# Altium PCB Bluetooth Transmitter.PcbDoc
Units mil, origin at the board's own origin, x right, y up, seen from the top; angles counter-clockwise.
Board outline 6000 x 4000 mil, 2 copper layers (Top Layer, Bottom Layer); 22 components, 26 nets, 127 pads, 22 vias.
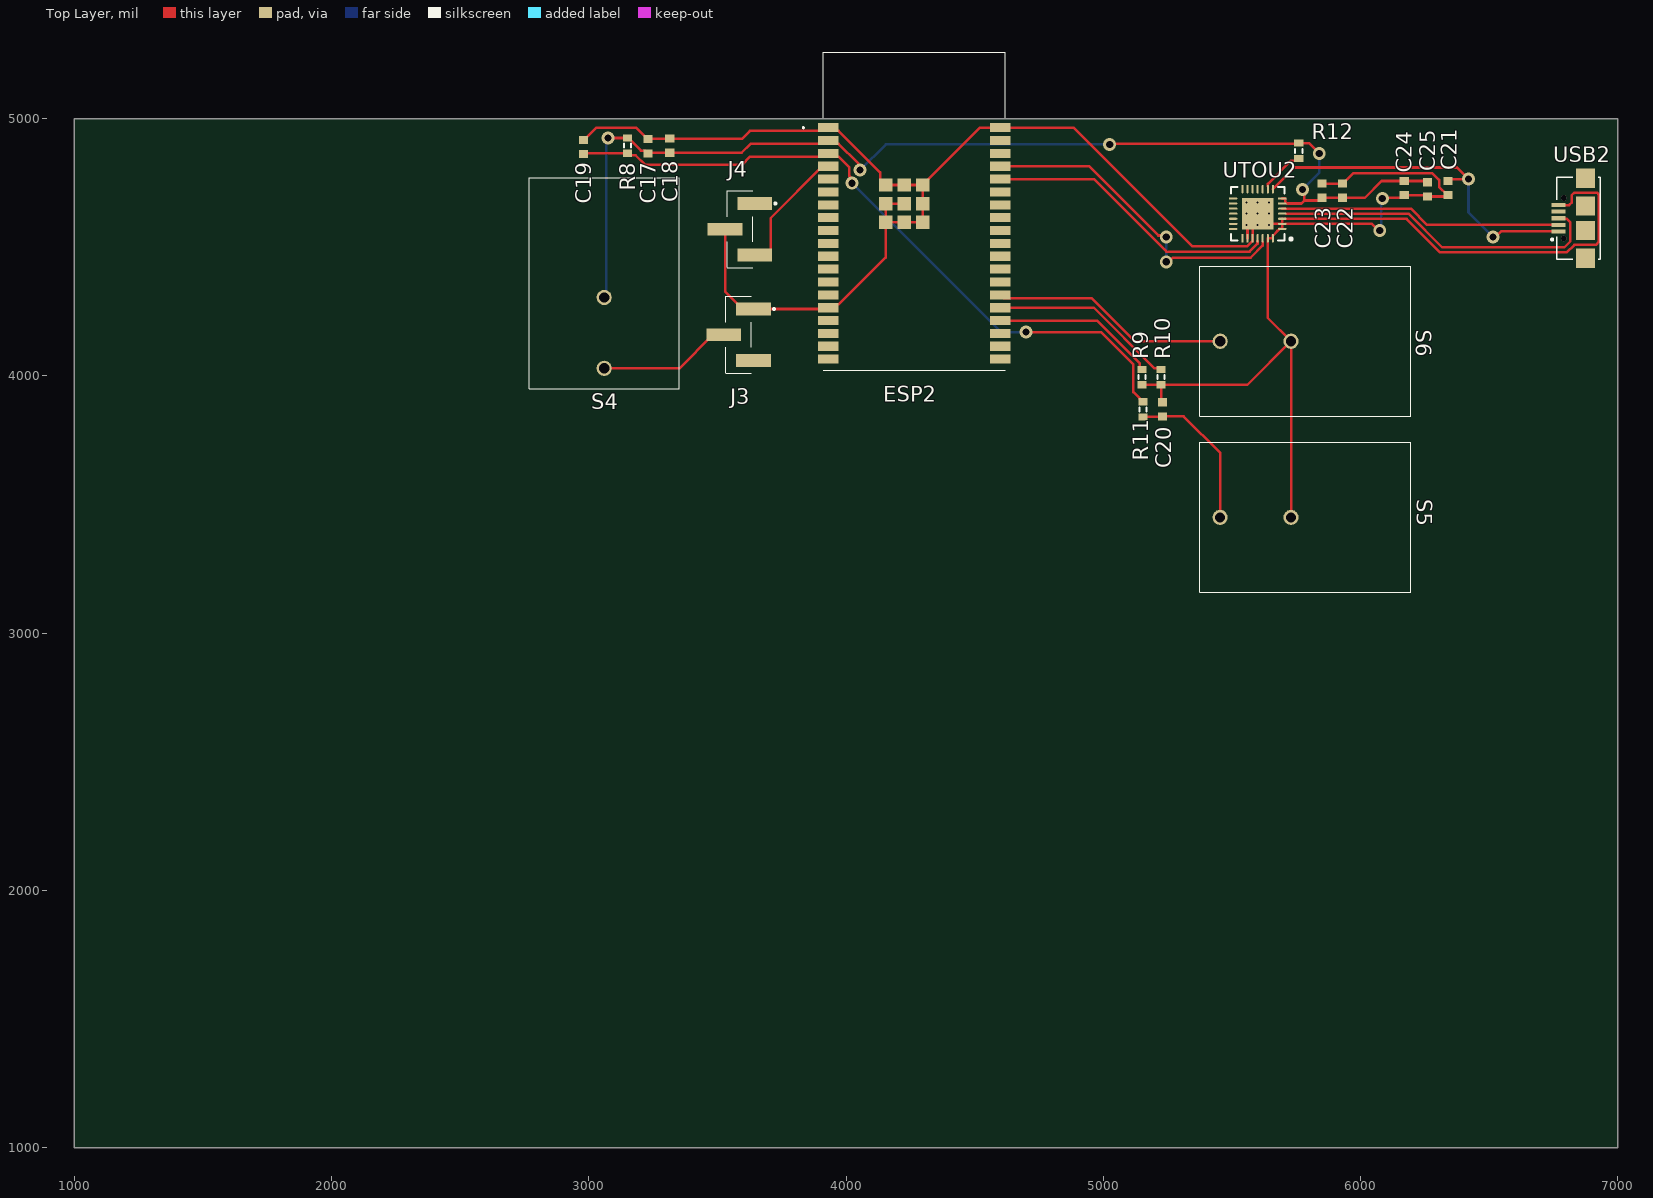
[diagram p0: Top Layer view]
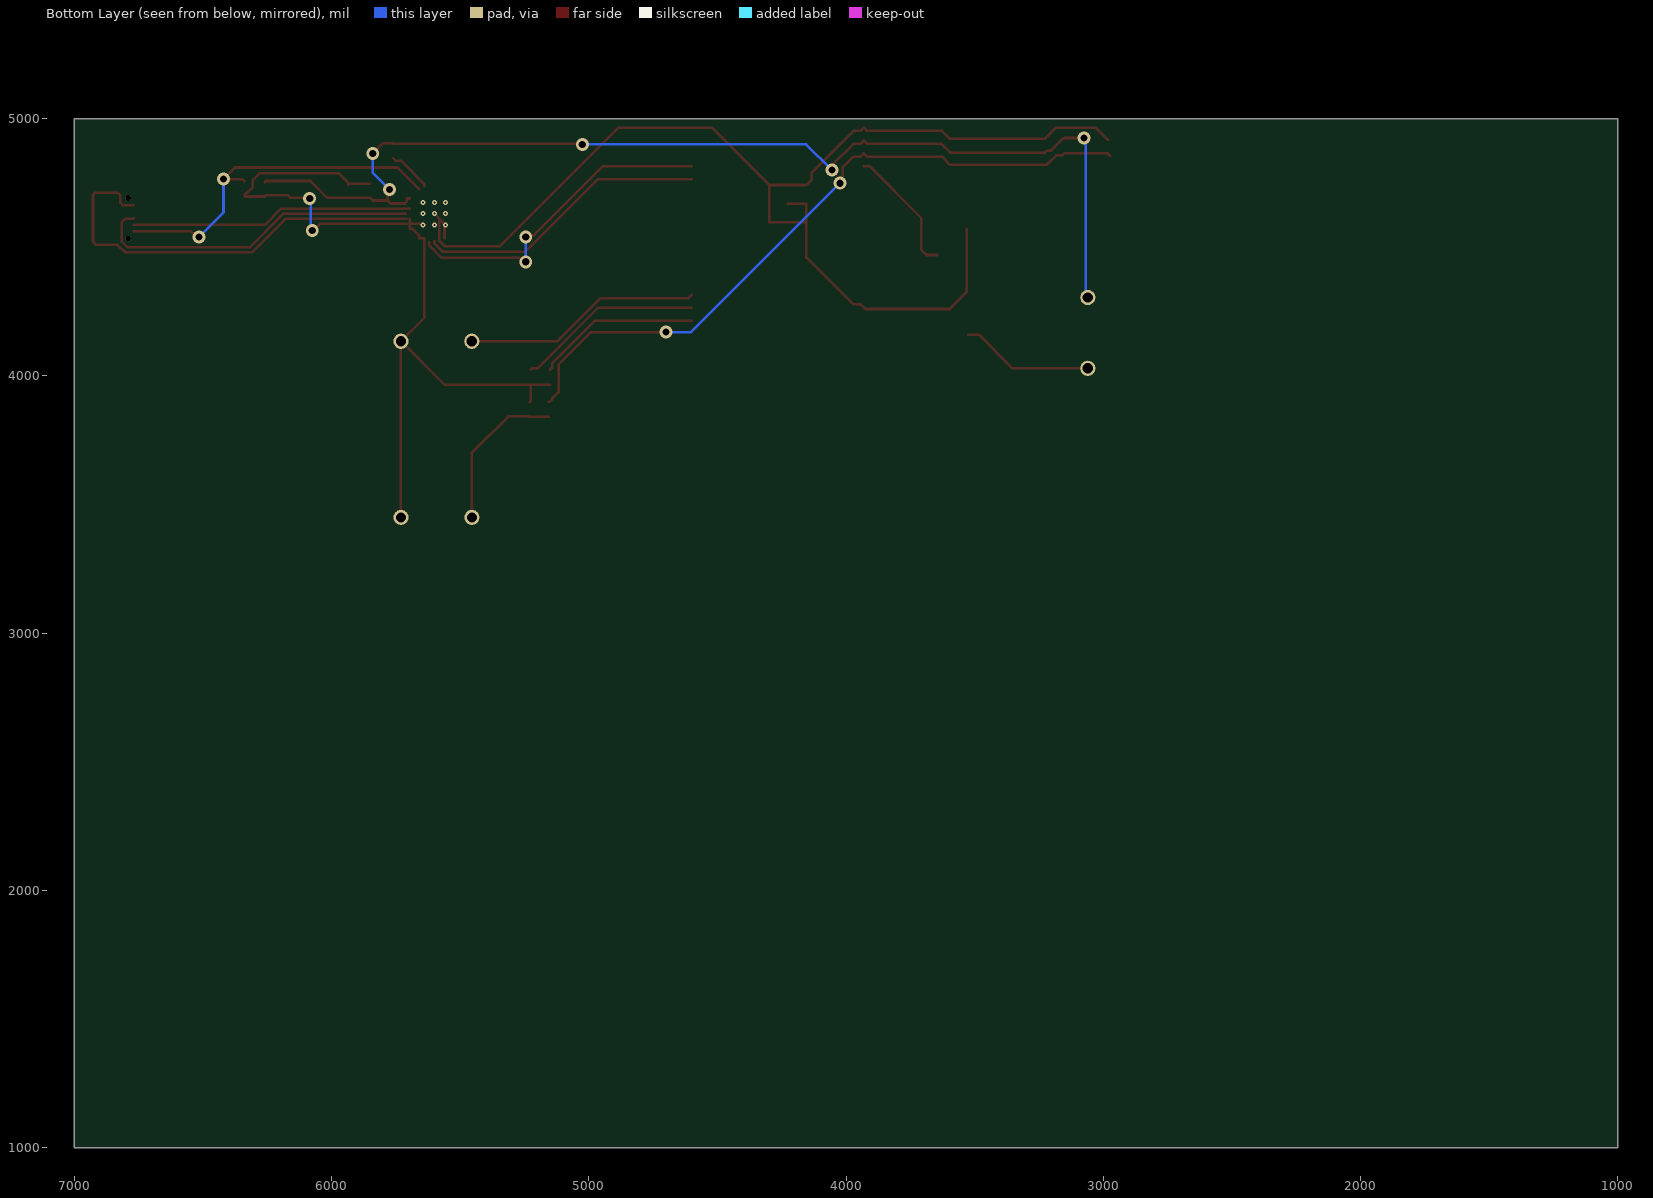
[diagram p1: Bottom Layer view, seen from below]

## Layer stack, top to bottom
Top Solder: solder mask 0.4, Solder Resist, Dk 3.5
Top Layer: signal copper 1.4
Dielectric 1: dielectric 12.6, FR-4, Dk 4.8
Bottom Layer: signal copper 1.4
Bottom Solder: solder mask 0.4, Solder Resist, Dk 3.5

## Board outline
1000,1000 7000,1000 7000,5000 1000,5000

## Design rules (kind name [scope] priority, off if disabled: settings)
Clearance [All] p1: gap=5 ignorepadtopadclearanceinfootprint=FALSE except(0: Arc-Hole Track-Hole SMDPad-Hole THPad-Hole Via-Hole Fill-Hole Poly-Hole Region-Hole Text-Hole)
PolygonConnect [All] p1: connectstyle=Relief reliefconductorwidth=10 reliefentries=4 polygonreliefangle="90 Angle" airgapwidth=10
RoutingVias [All] p1: holewidth=28 width=50 viastyle="Through Hole" minholewidth=28 minwidth=50 maxholewidth=28 maxwidth=50
SolderMaskExpansion [All] p1: expansion=4 istentingtop=FALSE
Width [All] p1: maxlimit=10 minlimit=10 preferedwidth=10
30 further rules are at their usual default settings.

## Components (designator, comment, footprint, x,y, rotation, side; value= is the part's Value field where it differs from the comment)
C17 "Cap" 1608[0603] 3230,4892.56 r270 top value=22uF
C18 "Cap" 1608[0603] 3315,4895 r270 top value=0.1uF
C19 "Cap" 1608[0603] 2980,4890 r270 top value=1uF
C20 "Cap" 1608[0603] 5230,3870 r90 top value=0.1uF
C21 "Cap" 1608[0603] 6340,4730 r90 top value=1uF
C22 "Cap" 1608[0603] 5930,4720 r90 top value=0.1uF
C23 "Cap" 1608[0603] 5850,4720 r90 top value=1uF
C24 "Cap" 1608[0603] 6170,4730 r90 top value=4.7uF
C25 "Cap" 1608[0603] 6260,4725 r90 top value=0.1uF
ESP2 "ESP32-WROVER-E__16MB_" ESP32WROVERE16MB 3930.71,4669.72 r0 top
J3 "TSM-103-01-L-SV-P-TR" TSM10301LSVPTR 3582.48,4160 r90 top
J4 "TSM-103-01-L-SV-P-TR" TSM10301LSVPTR 3587.52,4570 r90 top
R8 "Res3" J1-0603 3150,4895 r270 top value=10K
R9 "Res3" J1-0603 5150,3995 r270 top value=10K
R10 "Res3" J1-0603 5225,3995 r270 top value=10K
R11 "Res3" J1-0603 5155,3870 r90 top value=4.7K
R12 "Res3" J1-0603 5760,4875 r270 top value=10K
S4 "ON/OFF" R1966ABLKBLKEF 3060,4305 r270 top
S5 "EN" R1966ABLKBLKEF 5730,3450 r180 top
S6 "BOOT" R1966ABLKBLKEF 5730.3,4134.7 r180 top
USB2 "UJ2-MIBH-G-SMT-TR" CUI_UJ2-MIBH-G-SMT-TR 6875,4612.76 r90 top
UTOU2 "CP2101-GM" SLAB-QFN-28-3125x3125TP_A_N 5600.31,4630.47 r180 top

## Footprints (in the part's own frame and the unit in brackets; to place one, negate y for a bottom-side part, rotate by r counter-clockwise, add the part's x,y. Pads: shape width x height; smd on the part's side, far side on the other; paste and mask are expansions set on the pad)
1608[0603] [mm] "Chip Capacitor, Body 1.6x0.8mm, IPC High Density"
  rect 0.8x0.9 smd: 1(-0.7,0) 2(0.7,0)
  body extent -0.87,-0.48 0.87,0.48, height 1.3
CUI_UJ2-MIBH-G-SMT-TR [mm]
  rect 0.4x1.35 smd: 1(-1.3,2.675) 2(-0.65,2.675) 3(0,2.675) 4(0.65,2.675) 5(1.3,2.675)
  rect 1.9x1.9 smd: S1(-3.95,0) S2(-1.2,0) S3(1.2,0) S4(3.95,0)
  round 0.55 hole 0.55 unplated: ""(-2,2.15) ""(2,2.15)
  silkscreen extent -4.05,-1.45 4.05,3.4
ESP32WROVERE16MB [mm]
  rect 2x0.9 smd: 1(0,7.5) 2(0,6.23) 3(0,4.96) 4(0,3.69) 5(0,2.42) 6(0,1.15) 7(0,-0.12) 8(0,-1.39) 9(0,-2.66) 10(0,-3.93) 11(0,-5.2) 12(0,-6.47) 13(0,-7.74) 14(0,-9.01) 15(0,-10.28) 16(0,-11.55) 17(0,-12.82) 18(0,-14.09) 19(0,-15.36) 20(17,-15.36) 21(17,-14.09) 22(17,-12.82) 23(17,-11.55) 24(17,-10.28) 25(17,-9.01) 26(17,-7.74) 27(17,-6.47) 28(17,-5.2) 29(17,-3.93) 30(17,-2.66) 31(17,-1.39) 32(17,-0.12) 33(17,1.15) 34(17,2.42) 35(17,3.69) 36(17,4.96) 37(17,6.23) 38(17,7.5)
  rect 1.33x1.33 smd: 39(5.665,1.835) 40(7.5,1.835) 41(9.335,1.835) 42(5.665,0) 43(7.5,0) 44(9.335,0) 45(5.665,-1.835) 46(7.5,-1.835) 47(9.335,-1.835)
  silkscreen extent -2.5,-16.46 17.5,14.94, body extent -0.51,-16.46 17.49,14.94, height 3.31
J1-0603 [mm] "Chip Resistor, Body 1.6x0.8mm, IPC High Density"
  rect 0.7x0.9 smd: 1(-0.75,0) 2(0.75,0)
  silkscreen extent -0.2,-0.35 0.2,0.35, body extent -0.85,-0.48 0.85,0.48, height 0.9
R1966ABLKBLKEF [mm]
  round 1.5 hole 1: 1(0,0) 2(7,0)
  silkscreen extent -11.8,-7.4 9,7.4
SLAB-QFN-28-3125x3125TP_A_N [mm] "QFN, 28-Leads, Body 5x5mm, Pitch 0.5mm, Thermal Pad 3.13x3.13mm, IPC Medium Density"
  oval 0.85x0.2 smd: 1(-2.425,1.5) 2(-2.425,1) 3(-2.425,0.5) 4(-2.425,0) 5(-2.425,-0.5) 6(-2.425,-1) 7(-2.425,-1.5) 15(2.425,-1.5) 16(2.425,-1) 17(2.425,-0.5) 18(2.425,0) 19(2.425,0.5) 20(2.425,1) 21(2.425,1.5)
  oval 0.2x0.85 smd: 8(-1.5,-2.425) 9(-1,-2.425) 10(-0.5,-2.425) 11(0,-2.425) 12(0.5,-2.425) 13(1,-2.425) 14(1.5,-2.425) 22(1.5,2.425) 23(1,2.425) 24(0.5,2.425) 25(0,2.425) 26(-0.5,2.425) 27(-1,2.425) 28(-1.5,2.425)
  rect 3.13x3.13 smd: 29(0,0)
  silkscreen extent -3.42,-2.65 2.65,2.65, body extent -2.5,-2.5 2.5,2.5, height 1
TSM10301LSVPTR [mm]
  rect 1.27x3.43 smd: 1(2.54,-1.46) 2(0,1.46) 3(-2.54,-1.46)
  silkscreen extent -3.81,-3.6 3.81,1.27

## Part data
C17 C18 C19 C20 C21 C22 C23 C24 C25: library part "Cap Semi", "Capacitor (Semiconductor SIM Model)", LatestRevisionDate=29-May-2009, LatestRevisionNote="IPC-7351 Footprint Added.", PackageDescription="Chip Capacitor", PackageReference=C1206, Published=8-Jun-2000, Publisher="Altium Limited"
ESP2: "Integrated Circuit", Manufacturer_Name="Espressif Systems", Manufacturer_Part_Number="ESP32-WROVER-E (16MB)", Mouser Part Number=356-ESP32WRVE22864PC, Datasheet Link=https://www.espressif.com/sites/default/files/documentation/esp32-wrover_datasheet_en.pdf, Height=3.4mm, Mouser Price/Stock=https://www.mouser.co.uk/ProductDetail/Espressif-Systems/ESP32-WROVER-E-16MB?qs=GBLSl2Akirv1e4kp%252BlJr4g%3D%3D
J3 J4: "Connector", Manufacturer_Name=SAMTEC, Mouser Part Number=200-TSM10301LSVPTR, Arrow Part Number=TSM-103-01-L-SV-P-TR, Arrow Price/Stock=https://www.arrow.com/en/products/tsm-103-01-l-sv-p-tr/samtec?region=europe, Datasheet Link=https://datasheet.datasheetarchive.com/originals/dk/DKDS40/DSANUWW0019078.pdf, Manufacturer_Part_Number=TSM-103-01-L-SV-P-TR, Mouser Price/Stock=https://www.mouser.co.uk/ProductDetail/Samtec/TSM-103-01-L-SV-P-TR?qs=DZ6FV2pdG5tjRaLOEfFPgw%3D%3D
R8 R9 R10 R11 R12: "Resistor", LatestRevisionDate=29-May-2009, LatestRevisionNote="IPC-7351 Footprint Added.", PackageDescription="Chip Resistor", PackageReference=J1-0603, Published=8-Jun-2000, Publisher="Altium Limited"
S4 S5 S6: library part SW-PB, "Switch", LatestRevisionDate=17-Jul-2002, LatestRevisionNote="Re-released for DXP Platform.", PackageDescription="Switch; 2 Leads", PackageReference=SPST-2, Published=24-Mar-1999, Publisher="Altium Limited"
USB2: "USB micro B type receptacle", Package=None, Availability=Unavailable, MP=UJ2-MIBH-G-SMT-TR, Price=None
UTOU2: "Single-Chip USB to UART Bridge, 512 Bytes EEPROM, -40 to 85 degC, 28-pin QFN, Tube", Manufacturer="Silicon Labs", ComponentLink1Description="Manufacturer URL", ComponentLink1URL=http://www.silabs.com/, ComponentLink2Description=Datasheet, ComponentLink2URL=http://www.silabs.com/Support%20Documents/TechnicalDocs/CP2101.pdf, ComponentLink3Description="Package Specification", ComponentLink3URL=http://www.silabs.com/Support%20Documents/TechnicalDocs/C8051F35x.pdf, DatasheetVersion="Rev. 1.8", EEPROM="512 Bytes", Internal Oscillator=TRUE, Mounting Technology="Surface Mount", PackageDescription="28-Pin Quad-Flat No-Leads Package, Body 5 x 5 mm, Pitch 0.5 mm", PackageReference=QFN-28, PartNumber=CP2101-GM, Sub-Family="USB Bridges"

## Via types
v1: diameter 50, hole 28, Top Layer to Bottom Layer, 13 vias
v2: diameter 19.68, hole 7.87, Top Layer to Bottom Layer, 9 vias

## Nets (pads, with @x,y where several pads share a name; then routed paths per layer and width w, separated by ;. In a path a pad name is that pad's centre, name@x,y a point inside that pad or via, vN(x,y) a via of type N, cw(c..) or ccw(c..) an arc to the next point about the centre after c; other vN are vias at no path point)
3V3: C17.2 C18.2 C22.1 C23.1 C24.2 C25.2 ESP2.2 R8.1 R12.1 S4.1 UTOU2.6 UTOU2.7 | length 4385.4
  Top Layer w10: v1(3075,4925) 3075.24,4924.76 3149.29,4924.76 3149.53,4925 R8.1 3153.94,4924.53 3202.72,4875.75 3219.25,4875.75 C17.2 3232.44,4867.44 C18.2 3594.61,4867.44 3629.45,4902.28 3917.99,4902.28 ESP2.2 3943.43,4902.28 3971.73,4902.28 4047.35,4826.66 4047.35,4807.65 v1(4055,4800) ; v1(5025,4900) 5027.26,4902.26 5757.74,4902.26 R12.1 5800.47,4904.53 v1(5840,4865) ; UTOU2.7 5706.46,4689.53 5707.52,4688.46 5707.52,4677.8 5715.31,4670 5770.3,4670 5781.99,4681.69 ; v1(5775,4725) 5781.99,4718.01 5781.99,4681.69 ; C25.2 6255,4757.56 C24.2 6082.56,4757.56 6017.44,4692.44 C22.1 C23.1 5839.25,4681.69 5781.99,4681.69
  Bottom Layer w10: S4.1 3067.5,4312.5 3067.5,4917.5 v1(3075,4925) ; v1(4055,4800) 4155,4900 v1(5025,4900) ; v1(5775,4725) 5840,4790 v1(5840,4865)
"ANALOG IN": ESP2.4 J4.3 | length 500.9
  Top Layer w10: J4.3 3687.52,4470 3707.52,4490 3707.52,4613.46 3909.06,4815 ESP2.4
"Channel 1": 
"Channel 2": 
D+: USB2.3 UTOU2.4 | length 1295
  Top Layer w10: UTOU2.4@5710.95,4630 6187.82,4630 6317.82,4500 6792.86,4500 6816.18,4523.32 6816.18,4596.33 6802.47,4610.04 6772.4,4610.04 USB2.3
D-: USB2.2 UTOU2.5 | length 1100
  Top Layer w10: UTOU2.5 5695.94,4650 6196.1,4650 6258.94,4587.17 USB2.2
EN: C19.2 ESP2.3 R8.2 R11.2 | length 2728.5
  Top Layer w10: C19.2@2973.03,4855.47 C19.2 2983.03,4865.47 R8.2 3157.87,4857.61 3182.72,4857.61 3220.32,4820 3595,4820 3627.28,4852.28 3917.99,4852.28 ESP2.3 3943.43,4852.28 3971.73,4852.28 4013.36,4810.65 4013.36,4776.64 4015.55,4774.45 4015.55,4756.77 v1(4023.2,4749.12) v1@4030,4742.32 ; v1(4700,4170) 4991.72,4170 5117.28,4044.43 5117.28,3937.24 5142.28,3912.24 5142.28,3908.31 5151.06,3899.53 R11.2
  Bottom Layer w10: v1(4023.2,4749.12) 4602.32,4170 v1(4700,4170)
GND: C17.1 C18.1 C19.1 C20.2 C21.1 C22.2 C23.2 C24.1 C25.1 ESP2.1 ESP2.15 ESP2.38 ESP2.39 ESP2.40 ESP2.41 ESP2.42 ESP2.43 ESP2.44 ESP2.45 ESP2.46 ESP2.47 J3.1 J4.2 R9.2 R10.2 S5.1 S6.1 USB2.5 UTOU2.1 UTOU2.2 UTOU2.3 UTOU2.23 UTOU2.24 UTOU2.27 UTOU2.28 UTOU2.29 | length 9830.8
  Top Layer w10: C19.1 2981.97,4917.56 3029.41,4965 3183.15,4965 3225.59,4922.56 C18.1 3597.17,4922.56 3626.89,4952.28 3917.99,4952.28 ESP2.1 3943.43,4952.28 3971.73,4952.28 4132.56,4791.45 4132.56,4763.15 ESP2.39 ESP2.40 ESP2.41 ; J4.2 3530.04,4327.4 3597.44,4260 J3.1 3925.71,4260 ESP2.15 3943.43,4277.72 3971.73,4277.72 4153.74,4459.73 ESP2.45 ; ESP2.43 ESP2.42 ESP2.45 ; R9.2 R10.2 ; C20.2 5225,3902.56 R10.2 ; UTOU2.23 5560.94,4591.1 UTOU2.29@5580.63,4610.79 ; v2(5600.31,4630.47) UTOU2.29@5580.63,4610.79 ; v2(5643.62,4587.17) 5647.56,4591.1 UTOU2.2 ; UTOU2.3 UTOU2.2 ; UTOU2.2@5707.52,4591.1 6044.53,4591.1 6070.64,4565 v1(6075,4565) ; UTOU2.3@5707.52,4610 6179.53,4610 6309.53,4480 6801.74,4480 6831.39,4509.65 6915.15,4509.65 6927.4,4521.9 6927.4,4703.61 6918.61,4712.4 6831.39,4712.4 6821.32,4702.34 6821.32,4674 6811.26,4663.94 USB2.5 ; S5.1 5730.3,3450.3 S6.1 S6.1@5730,4135 ; C23.2 C22.2 5935.37,4742.19 5935.37,4750.96 5972.72,4788.31 6278.93,4788.31 6305.61,4761.63 6305.61,4734.87 6338.03,4702.44 C21.1 6335,4697.44 C25.1 6255,4702.44 C24.1 6159.25,4691.69 6086.69,4691.69 v1(6085,4690) v1@6082.56,4692.44 ; ESP2.45 ESP2.46 ESP2.47 ESP2.44 ESP2.41 ; ESP2.41 4521.26,4965 ESP2.38 4885,4965 5346.73,4503.27 5559.57,4503.27 5580.63,4524.33 UTOU2.24 UTOU2.29@5580.63,4610.79 ; R10.2 5560.47,3965.47 S6.1@5730,4135 ; UTOU2.2 UTOU2.1 5685.12,4571.42 5676.93,4563.23 5676.93,4562.65 5661.02,4546.73 5660.43,4546.73 5659.37,4545.67 UTOU2.28 UTOU2.27 5639.57,4534.88 5639.57,4225.43 S6.1@5730,4135
  Bottom Layer w10: v1(6075,4565) 6080,4570 6080,4685 v1(6085,4690)
  other v2: 5557.01,4587.17 5600.31,4587.17 5557.01,4630.47 5643.62,4630.47 5557.01,4673.78 5600.31,4673.78 5643.62,4673.78
IO0: ESP2.25 S6.2 | length 929
  Top Layer w10: ESP2.25 4612.72,4302.28 4954.11,4302.28 5121.39,4135 S6.2@5454.41,4135
IO2: ESP2.24 R10.1 | length 724.6
  Top Layer w10: ESP2.24 4963.11,4265 5198.14,4029.97 5219.56,4029.97 R10.1
IO15: ESP2.23 R9.1 | length 638
  Top Layer w10: ESP2.23 4975,4215 5142.55,4047.45 5142.55,4031.98 R9.1
IO25: 
IO26: 
NetC4_1: 
NetC5_2: 
NetC6_1: 
NetC12_2: 
NetC13_1: 
NetC20_1: C20.1 R11.1 S5.2 | length 610.1
  Top Layer w10: R11.1 5228.03,3840.47 C20.1 5312.56,3842.44 5455,3700 5455,3450.59 S5.2
NetJ1_2: 
NetJ3_2: J3.2 S4.2 | length 519.1
  Top Layer w10: S4.2 3351.89,4029.41 3482.48,4160 J3.2
NetR6_2: 
NetR12_2: R12.2 UTOU2.9 | length 169.6
  Top Layer w10: UTOU2.9@5640,4737.68 5640,4746.15 5730.54,4836.69 5751.22,4836.69 R12.2
RXD0: ESP2.34 UTOU2.25 | length 1138.1
  Top Layer w10: ESP2.34 4963.43,4765 5245.16,4483.27 5568.47,4483.27 5599.57,4514.36 UTOU2.25@5599.57,4523.27
TXD0: ESP2.35 UTOU2.26 | length 1270.3
  Top Layer w10: ESP2.35 4945,4815 5214.22,4545.78 5239.22,4545.78 v1(5245,4540) ; v1(5244.88,4443.27) 5254.01,4443.27 5270.74,4460 5573.49,4460 5619.57,4506.08 UTOU2.26@5619.57,4520
  Bottom Layer w10: v1(5244.88,4443.27) 5245,4443.39 v1(5245,4540)
VBUS: C21.2 USB2.1 UTOU2.8 | length 1425.1
  Top Layer w10: UTOU2.8 5743.43,4810 6375,4810 v1(6420,4765) 6347.44,4765 C21.2 ; v1(6515,4540) 6525,4540 6546.57,4561.57 USB2.1
  Bottom Layer w10: v1(6420,4765) 6420,4635 v1(6515,4540)
pads on no net: ESP2.5 ESP2.6 ESP2.7 ESP2.8 ESP2.9 ESP2.10 ESP2.11 ESP2.12 ESP2.13 ESP2.14 ESP2.16 ESP2.17 ESP2.18 ESP2.19 ESP2.20 ESP2.21 ESP2.22 ESP2.26 ESP2.27 ESP2.28 ESP2.29 ESP2.30 ESP2.31 ESP2.32 ESP2.33 ESP2.36 ESP2.37 J3.3 J4.1 USB2. USB2.4 USB2.S1 USB2.S2 USB2.S3 USB2.S4 UTOU2.10 UTOU2.11 UTOU2.12 UTOU2.13 UTOU2.14 UTOU2.15 UTOU2.16 UTOU2.17 UTOU2.18 UTOU2.19 UTOU2.20 UTOU2.21 UTOU2.22